# EAGLE board KAI_bit (EAGLE 9.6.2)
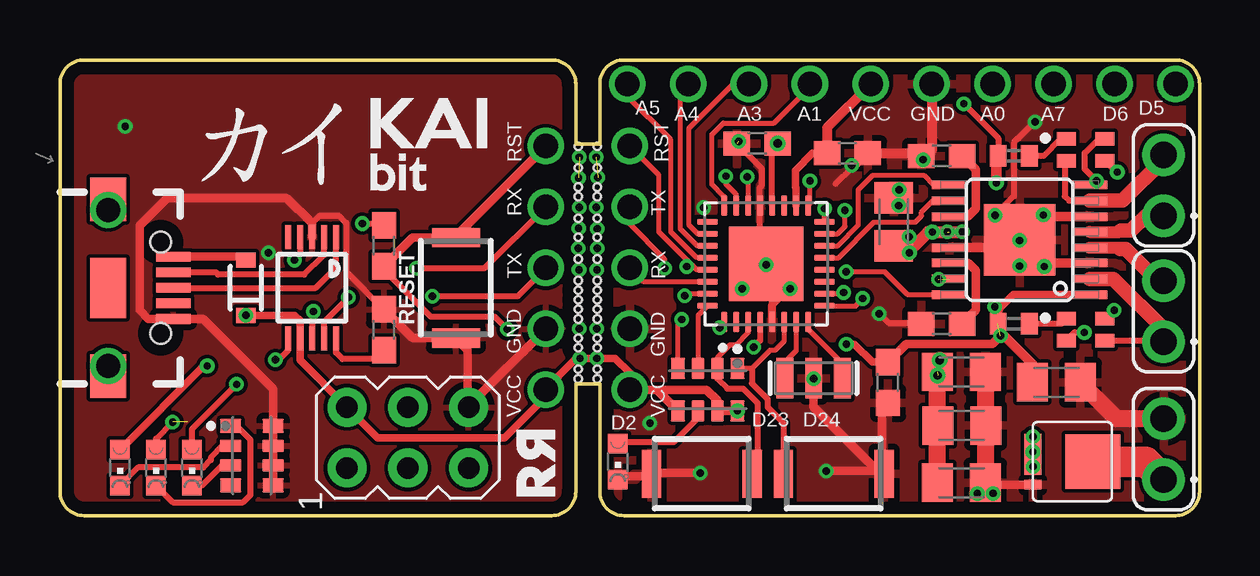
[diagram p0: board, top side]
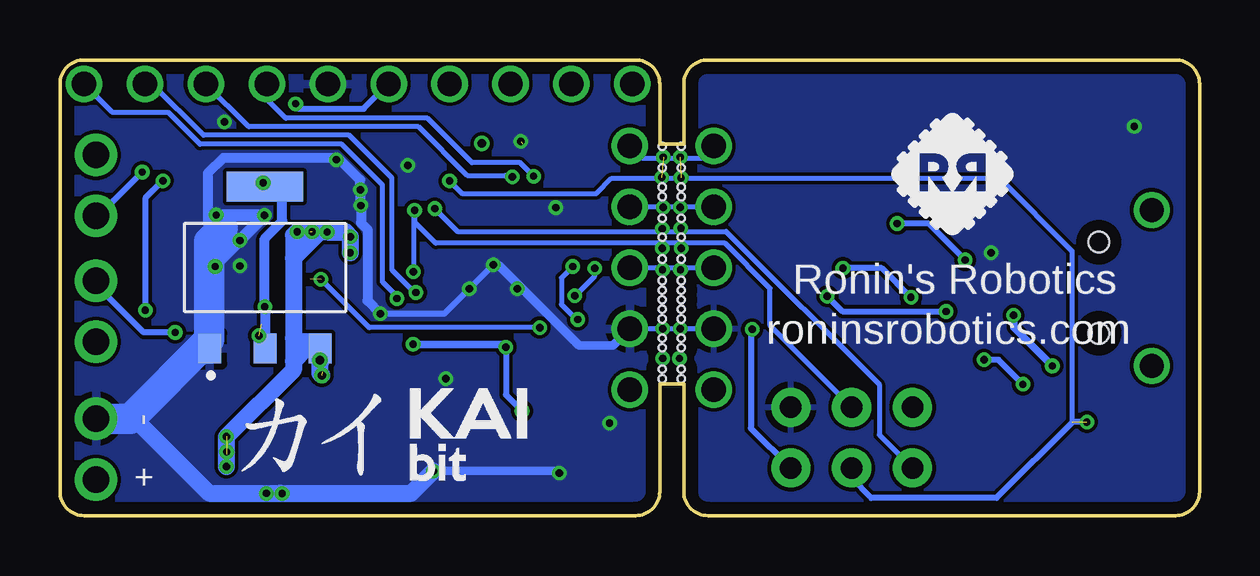
[diagram p1: board, bottom side, seen from below]

Size 47.5 x 19 mm. Coordinates in mm from the lower left corner, seen from the top.
Outline: 23.5,19 46.5,19 arc-90 47.5,18 47.5,1 arc-90 46.5,0 23.5,0 arc-90 22.5,1 22.5,5.5 21.5,5.5 21.5,1 arc-90 20.5,0 1,0 arc-90 0,1 0,18 arc-90 1,19 20.5,19 arc-90 21.5,18 21.5,15.5 22.5,15.5 22.5,18 arc-90 23.5,19
Copper layers (1*16): Top 0.035mm / dielectric 1.6mm / Bottom 0.035mm
Design rules "Elecrow_2-layer_PCB_eagle_rule": minimum track width 6mil, minimum drill 12mil, track to track 6mil, track to pad 6mil, pad to pad 6mil, via to via 8mil, smd to smd 0mil, copper to edge 20mil, drill to drill 10mil, minimum pad ring 6mil, minimum via ring 6mil, stop-mask expansion 0mil, vias tented up to drill 100mil, thermal gap 10mil
Holes 0.3 mm at 22.4,5.7 22.4,6.1 22.4,7 22.4,7.4 22.4,8.2 22.4,8.6 22.4,9 22.4,9.4 22.4,9.8 22.4,10.7 22.4,11.6 22.4,12.4 22.4,13.3 22.4,13.7 22.4,14.5 22.4,15.4 21.6,5.7 21.6,6.1 21.6,7 21.6,7.4 21.6,8.2 21.6,8.6 21.6,9 21.6,9.4 21.6,9.8 21.6,10.7 21.6,11.6 21.6,12.4 21.6,13.3 21.6,13.7 21.6,14.5 21.6,15.4

## Footprints (pad centres in the part's own frame; a part is rotated, then mirrored left to right if it is on the bottom)
C0805K = smd 1.3 x 1.6: 1 -1,0; 2 1,0
SOD-323 = smd 0.63 x 0.83: 1 -1.15,0; 2 1.15,0
AVRISP = drill 0.9 pad 1.626: 1 -1.27,2.54; 2 1.27,2.54; 3 -1.27,0; 4 1.27,0; 5 -1.27,-2.54; 6 1.27,-2.54
USB-B-MICRO-SMD = smd 1.45 x 0.4: D+ 2.725,0; D- 2.725,0.65; GND 2.725,-1.3; ID 2.725,-0.65; VBUS 2.725,1.3 | smd 1.5 x 1.8: SHIELD1 0,3.685; SHIELD2 0,-3.685 | smd 1.5 x 2.5: SHIELD3 0,0 | hole 0.85: 2.2,1.9; 2.2,-1.9
1X10DFR = drill 1.016 pad 1.524: P$1 0,0; P$2 2.54,0; P$3 5.08,0; P$4 7.62,0; P$5 10.16,0; P$6 12.7,0; P$7 15.24,0; P$8 17.78,0; P$9 20.32,0; P$10 22.86,0
0603-RGB = smd 0.8 x 0.55: 1 -0.805,0.455; 2 -0.805,-0.455; 3 0.805,-0.455; 4 0.805,0.455
DFN-8_3X3 = smd 2.29 x 2.29: D 0,0.8 | smd 0.4 x 0.7: G 0.96,-1.7 | smd 1.7 x 0.7: S -0.3,-1.7
R0402 = smd 0.7 x 0.9: 1 -0.65,0; 2 0.65,0
RESCAXS80P320X160X70-8N = smd 0.61 x 0.9: 1 -1.24,-0.885; 4 1.24,-0.885; 5 1.24,0.885; 8 -1.24,0.885 | smd 0.53 x 0.9: 2 -0.4,-0.885; 3 0.4,-0.885; 6 0.4,0.885; 7 -0.4,0.885
SKRK = smd 0.8 x 2: 1 -2.1,0; 2 2.1,0
MSOP10 = smd 1 x 0.25: 1 -2.113,1; 2 -2.113,0.5; 3 -2.113,0; 4 -2.113,-0.5; 5 -2.113,-1; 6 2.113,-1; 7 2.113,-0.5; 8 2.113,0; 9 2.113,0.5; 10 2.113,1
QFN50P500X500X90-33N = smd 0.86 x 0.26: 1 -2.435,1.75; 2 -2.435,1.25; 3 -2.435,0.75; 4 -2.435,0.25; 5 -2.435,-0.25; 6 -2.435,-0.75; 7 -2.435,-1.25; 8 -2.435,-1.75; 17 2.435,-1.75; 18 2.435,-1.25; 19 2.435,-0.75; 20 2.435,-0.25; 21 2.435,0.25; 22 2.435,0.75; 23 2.435,1.25; 24 2.435,1.75 | smd 0.26 x 0.86: 9 -1.75,-2.435; 10 -1.25,-2.435; 11 -0.75,-2.435; 12 -0.25,-2.435; 13 0.25,-2.435; 14 0.75,-2.435; 15 1.25,-2.435; 16 1.75,-2.435; 25 1.75,2.435; 26 1.25,2.435; 27 0.75,2.435; 28 0.25,2.435; 29 -0.25,2.435; 30 -0.75,2.435; 31 -1.25,2.435; 32 -1.75,2.435 | smd 3.1 x 3.1: 33 0,0
SOT-223 = smd 0.96 x 1.26: 1 -2.3,-3.375; 2 0,-3.375; 3 2.3,-3.375 | smd 3.19 x 1.26: 4 0,3.375
SOP65P640X120-17N = smd 1.473 x 0.356: 1 -2.921,2.286; 2 -2.921,1.626; 3 -2.921,0.965; 4 -2.921,0.33; 5 -2.921,-0.33; 6 -2.921,-0.965; 7 -2.921,-1.626; 8 -2.921,-2.286; 9 2.921,-2.286; 10 2.921,-1.626; 11 2.921,-0.965; 12 2.921,-0.33; 13 2.921,0.33; 14 2.921,0.965; 15 2.921,1.626; 16 2.921,2.286 | smd 2.997 x 2.997: 17 0,0
RESONATOR-SMD = smd 0.7 x 1.7: 1 -1.2,0; 2 0,0; 3 1.2,0
1X2 = drill 1.092 pad 1.778: P$1 0,0; P$2 2.54,0
C0603 = smd 1.1 x 1: 1 -0.85,0; 2 0.85,0
0603_LED_GREEN = smd 0.8 x 0.8: A 0,-0.75; C 0,0.75
1X5DFR = drill 1.016 pad 1.524: P$1 0,0; P$2 2.54,0; P$3 5.08,0; P$4 7.62,0; P$5 10.16,0

## Placement (x,y rotation side)
C1  10uf  [C0805K]  34.75,12.25 270 top
C2  CAPACITOR_CER6  [C0805K]  37.57,5.99 0 top
C3  CAPACITOR_CER6  [C0805K]  41.54,5.55 0 top
C4  CAPACITOR_CER6  [C0805K]  37.59,3.75 0 top
C5  CAPACITOR_CER6  [C0805K]  37.58,1.37 0 top
D2  [SOD-323]  7.75,9.5 90 top
ISP1  AVRISP-6  [AVRISP]  14.5,3.25 90 top
J1  [USB-B-MICRO-SMD]  2,9.5 0 top
JP1  [1X10DFR]  46.5,18 180 top
L1  RGB  [0603-RGB]  42.75,15.25 180 top
L2  RGB  [0603-RGB]  42.75,7.75 180 top
Q1  AON7401  [DFN-8_3X3]  42.25,2.25 270 top
R1  RESISTOR1  [R0402]  39.75,8 180 top
R2  YC164-JR-071K5  [RESCAXS80P320X160X70-8N]  27,5.25 180 top
R3  RESISTOR1  [R0402]  39.75,15 180 top
R7  YC164-JR-071K5  [RESCAXS80P320X160X70-8N]  8,2.5 270 top
S1  SKRKAEE010  [SKRK]  16.5,9.5 90 top
S3  SKRKAEE010  [SKRK]  32.25,1.75 180 top
S4  SKRKAEE010  [SKRK]  26.75,1.75 0 top
U1  CH340ESMD  [MSOP10]  10.5,9.5 270 top
U2  ATMEGA328PB-MU  [QFN50P500X500X90-33N]  29.43,10.5 90 top
U4  NCP1117ST33T3G  [SOT-223]  38.95,10.35 0 bottom
U$1  DRV8833  [SOP65P640X120-17N]  40,11.5 180 top
U$2  RESONATORSMD  [RESONATOR-SMD]  31.41,5.73 180 top
U$3  1X2  [1X2]  46,1.5 90 top
U$4  2.2uf  [C0603]  36.75,8 0 top
U$5  CAPACITOR_CER4  [C0603]  34.51,5.55 90 top
U$6  100nf  [C0603]  36.75,15 0 top
U$7  CAPACITOR_CER4  [C0603]  29.06,15.51 0 top
U$8  CAPACITOR_CER4  [C0603]  32.82,15.11 180 top
U$9  CAPACITOR_CER4  [C0603]  13.5,11.25 90 top
U$10  CAPACITOR_CER4  [C0603]  13.5,7.75 90 top
U$11  1X2  [1X2]  46,7.25 90 top
U$12  LED0603_R  [0603_LED_GREEN]  5.5,2 180 top
U$13  1X2  [1X2]  46,12.5 90 top
U$14  LED0603_R  [0603_LED_GREEN]  2.5,2 180 top
U$15  LED0603_R  [0603_LED_GREEN]  23.25,2.25 180 top
U$16  1X5DFR  [1X5DFR]  20.25,5.25 90 top
U$17  1X5DFR  [1X5DFR]  23.75,5.25 90 top
U$21  LED0603_R  [0603_LED_GREEN]  4,2 180 top

## Library data of the parts
C1-C5 L1 L2 R1 R3 U$4-U$10 U$12 U$14 U$15 U$21 = pasif_com1
D2 U$2 = SparkFun
ISP1 = adafruit
J1 = SparkFun-Connectors; PROD_ID: CONN-11752
JP1 U$3 U$11 U$13 U$16 U$17 = header_3d
Q1 = AON7401
R2 R7 = YC164-JR-071K5; AVAILABILITY: Unavailable; DESCRIPTION: Resistor network: Y; 1.5kΩ; SMD; 1206; No.of resistors: 4; 63mW; ±5%; MF: Yageo; MP: YC164-JR-071K5; PACKAGE: 1206 Yageo; PRICE: None
S1 S3 S4 = SKRKAEE010; AVAILABILITY: Unavailable; DESCRIPTION: Switch Tactile N.O. SPST Round Button Gull Wing 0.05A 12VDC 1.57N SMD T/R; MF: ALPS; MP: SKRKAEE010; PACKAGE: None; PRICE: None
U1 = CH340E
U2 = atmega; MANUFACTURER: MICROCHIP; PACKAGE: QFN-32; PARTREV: C; STANDARD: IPC 7351B
U4 = IC; CREATED_BY: PCBLayout.com; DIGIKEY_PART_NUMBER: NCP1117ST33T3GOSTR-ND; MANUFACTURER: ON Semiconductor; MPN: NCP1117ST33T3G; PACKAGE: SOT-223
U$1 = icv1

## Nets
A0: JP1.P$4 U2.23
A1: JP1.P$7 U2.24
A2: U2.25
A3: JP1.P$8 U2.26
A4: JP1.P$9 U2.27
A5: JP1.P$10 U2.28
A6: U2.19
A7: JP1.P$3 U2.22
ARF: U2.20 U$7.2
D2: R2.3 U2.32
D3: U2.1 U$1.15
D4: U2.2
D5: JP1.P$1 U2.9
D6: JP1.P$2 U2.10
D7: U2.11
D8: U2.12
D9: U2.13 U$1.10
D10: U2.14 U$1.9
D11: ISP1.4 U2.15 U$1.16
D12: ISP1.1 U2.16
D13: ISP1.3 U2.17 U$21.A
D23: R2.2 S4.2 U2.3
D24: R2.1 S3.2 U2.6
GND: C1.1 C2.2 C3.2 C4.2 C5.2 ISP1.6 J1.GND JP1.P$5 Q1.G R7.5 R7.6 R7.7 R7.8 S1.1 S3.1 S4.1 U1.3 U2.5 U2.21 U4.1 U$1.3 U$1.6 U$1.13 U$1.17 U$2.2 U$3.P$2 U$4.1 U$5.1 U$6.1 U$7.1 U$8.1 U$10.2 U$15.C U$16.P$2 U$17.P$2
N$1: R7.1 U$21.C
N$2: L1.2 L2.2 U$1.8
N$3: J1.D- U1.2
N$4: R7.3 U$12.C
N$5: U1.10 U$10.1
N$6: J1.D+ U1.1
N$7: D2.2 J1.VBUS
N$8: U1.4 U$9.2
N$9: R7.2 U$14.C
N$10: U1.6 U$12.A
N$11: L1.3 R3.1
N$12: Q1.D U$3.P$1
N$13: L2.1 U$1.2 U$11.P$1
N$14: L2.3 R1.1
N$15: L2.4 U$1.4 U$11.P$2
N$16: L1.1 U$1.5 U$13.P$1
N$18: L1.4 U$1.7 U$13.P$2
N$19: R2.6 U$15.A
N$22: U$1.11 U$6.2
N$25: U$1.14 U$4.2
OC1: U2.7 U$2.3
OC2: U2.8 U$2.1
RST: ISP1.5 R2.4 S1.2 U2.29 U$9.1 U$16.P$5 U$17.P$5
RX: U1.8 U2.30 U$16.P$3 U$17.P$3
TX: U1.9 U2.31 U$16.P$4 U$17.P$4
VCC: C3.1 D2.1 ISP1.2 JP1.P$6 R1.2 R2.5 R2.7 R2.8 R3.2 U1.7 U2.4 U2.18 U4.2 U4.4 U$1.1 U$5.2 U$8.2 U$14.A U$16.P$1 U$17.P$1
VIN: C1.2 C2.1 C4.1 C5.1 Q1.S U4.3 U$1.12

## Tracks (layer width: path | path; a pad name or v marks a point on that pad's centre or on a via)
A0  (via drill 0.3)
  Top 0.2: U2.23 28.18,13.4 27.76,13.83 v27.76,14.15
  Bottom 0.2: v27.76,14.15 28.32,14.71 30.33,14.71 32.19,16.57 38.09,16.57 38.88,17.36 JP1.P$4
A1
  Top 0.2: U2.24 27.68,13.31 27.17,13.82 27.17,15.89 27.65,16.37 29.77,16.37 31.26,17.86 JP1.P$7
A3
  Top 0.2: U2.26 26.59,11.75 26.23,12.11 26.23,16.16 28.08,18.01 28.71,18.01 JP1.P$8
A4
  Top 0.2: U2.27 26.57,11.25 25.86,11.95 25.86,17.68 JP1.P$9
A5
  Top 0.2: U2.28 26.98,10.77 26.53,10.77 25.47,11.82 25.47,15.67 23.64,17.5 JP1.P$10
A7  (via drill 0.3)
  Top 0.2: U2.22 28.69,14.13 v28.65,14.13
  Bottom 0.2: v28.65,14.13 28.89,14.13 28.94,14.18 30.53,14.18 32.56,16.21 39.64,16.21 JP1.P$3
ARF  (via drill 0.35)
  Top 0.2: 29.77,15.37 U$7.2
  Top 0.254: 29.77,15.37 29.68,15.28 U2.20
  other vias: 29.91,15.51
D2
  Top 0.2: U2.32 26.6,8.35 R2.3
D3  (via drill 0.3)  (1 unrouted)
  Top 0.2: U2.1 27.5,7.89 v27.5,7.84
  Bottom 0.2: v27.5,7.84 34.61,7.84 v36.62,9.85
D5  (via drill 0.3)
  Top 0.2: U2.9 31.89,8.73 33.14,8.73 v33.46,9.05
  Bottom 0.2: v33.46,9.05 33.46,9.15 34.06,9.74 34.06,13.79 35.75,15.49 41.66,15.49 42.99,16.82 45.32,16.82 JP1.P$1
D6  (via drill 0.3)
  Top 0.2: v32.67,9.3 32.61,9.25 U2.10
  Bottom 0.2: v32.67,9.3 32.72,9.3 33.66,10.24 33.66,14.08 35.44,15.86 41.52,15.86 43.66,18 JP1.P$2
D9
  Top 0.2: U2.13 32.44,10.75 33.93,12.23 35.65,12.23 35.91,12.49 35.91,12.65 36.38,13.13 U$1.10
D10
  Top 0.2: U2.14 32.42,11.25 33.28,12.11 33.28,13.59 33.88,14.19 36,14.19 36.41,13.79 U$1.9
D11  (via drill 0.3)
  Top 0.2: U2.15 32.41,11.75 32.72,12.06 v32.72,12.73 | v32.77,10.17 34.37,10.17 35.33,9.21 U$1.16
  Bottom 0.2: v32.77,10.17 32.76,10.18 32.76,12.69 v32.72,12.73 32.72,12.24 31.84,11.36 19.79,11.36 17.91,9.47 17.91,7.92 ISP1.4
D12  (via drill 0.3)
  Top 0.2: U2.16 31.87,12.79 v31.88,12.8
  Bottom 0.2: v31.88,12.8 30.93,11.85 19.73,11.85 13.35,5.47 13.35,3.37 ISP1.1
D13  (via drill 0.3)  (1 unrouted)
  Top 0.2: U2.17 31.26,13.02 v31.26,13.95
  Top 0.254: U$21.A 4,3.2 v4.7,3.9
  Bottom 0.2: v31.26,13.95 30.75,13.44 25.14,13.44 24.51,14.06 8.34,14.06 5.31,11.04 5.31,3.9
  Bottom 0.254: v4.7,3.9 5.29,3.9 8.46,0.73 13.69,0.73 14.5,1.54 ISP1.3
D23
  Top 0.2: U2.3 28.68,7.63 28.18,7.12 27.94,7.12 27.4,6.59 R2.2
  Top 0.254: R2.2 27.4,5.71 27.81,5.29 28.47,5.29 29.07,4.69 29.07,1.97 S4.2
D24
  Top 0.2: R2.1 28.84,6.13 29.59,6.89 29.8,6.89 30.17,7.26 U2.6
  Top 0.254: 28.84,6.13 28.84,5.52 29.49,4.86 29.49,4.53 30.15,3.87 S3.2
GND  (via drill 0.3)  (1 unrouted)
  Top 0.2: 24.53,1.63 S4.1
  Top 0.254: U2.5 29.68,10.27 29.18,10.77 U2.21 29.18,13.7 29.25,13.77 29.25,14.48 U$7.1 | 35.83,8.07 U$4.1 35.88,8.02 34.56,8.02 34.24,8.35 34.22,8.35 v34.15,8.42 | S3.1 34.2,1.75 34.1,1.86 v31.93,1.86 | v34.98,13.58 34.98,13.48 C1.1 | 10.51,12.2 10.82,12.51 11.63,12.51 11.93,12.2 11.93,10.17 U$10.2 | v40.64,16.42 39.95,15.73 39.93,15.73 39.77,15.57 39.77,13.31 v38.98,12.53 | v33,14.6 33,14.51 32.32,13.84
  Top 0.305: U2.5 29.68,8.79 30.27,9.37 30.36,9.37 v30.44,9.46 | C2.2 38.58,3.77 C4.2 | U$8.1 33.16,14.6 v33,14.6
  Top 0.35: U$15.C 23.38,1.63 24.53,1.63 | S4.1 24.67,1.77 v26.69,1.77 | v31.93,1.86 34.24,1.86 34.25,1.85 | 34.25,1.85 S3.1 | 34.2,1.75 31.41,4.54 U$2.2 | 35.83,8.04 35.83,8.07 | U$16.P$2 17.04,4.58 | 17.04,4.58 16.99,4.53 16.99,6.91 S1.1 14.7,7.4 U$10.2 | 17.04,4.58 ISP1.6 | R7.5 R7.6 R7.8 8.88,5.28 5.96,8.2 J1.GND 3.68,8.2 3.32,8.56 3.32,12.09 4.48,13.24 9.46,13.24 10.51,12.2 U1.3 | U$5.1 34.25,4.44 34.25,1.85 | 38.69,1.29 Q1.G
  Top 0.4: U$1.6 40.84,12.46 40.66,12.65 40,11.99 U$1.17 | U$1.3 40.31,10.54 39.67,11.17 U$1.13
  Top 0.406: JP1.P$5 36.34,15.2 v35.98,14.84 35.98,14.92 U$6.1 35.79,15.11 U$8.1
  Top 0.508: 39.67,11.17 U$1.17
  Top 0.6: C3.2 42.54,5.85
  Top 0.7: C2.2 C5.2 | U$3.P$2 44.05,4.04 C3.2 | 38.69,1.29 38.61,1.37 C5.2 | C5.2 38.58,1.27 38.24,0.93
  Bottom 0.2: U$16.P$2 U$17.P$2
  Bottom 0.254: v34.15,8.42 31.48,8.42 v29.44,10.46
  Bottom 0.305: 26.67,1.77 v26.69,1.77
  Bottom 0.35: U$17.P$2 24.45,7.09 25.86,7.09 29.23,10.46 v29.44,10.46 | v26.69,1.77 26.77,1.86 v31.93,1.86
  Bottom 0.406: v40.99,12.53 41.34,12.19 41.34,14.27 40.68,14.93 36.06,14.93 v35.98,14.84 35.83,14.84 34.98,13.99 v34.98,13.58 34.98,12.96 v34.95,12.93 34.95,12.2 34.69,11.93 34.69,8.96 v34.15,8.42
  Bottom 0.5: v41.03,10.39 41.03,10.45 v40,11.47 38.98,12.49 v38.98,12.53 38.99,12.53 v40.99,12.53 40.72,12.26 40.72,11.98
  Bottom 0.7: 44.69,4.04 44.58,4.04 44.38,4.04 41.28,0.93 38.31,0.93 | v31.93,1.86 32.86,0.93 38.31,0.93 | v38.9,0.92 38.32,0.92 38.31,0.93
  Bottom 1.27: U$3.P$2 44.69,4.04 | 40.72,11.98 41.27,11.43 41.27,7.34 44.58,4.04
  other vias: 28.44,9.46 8.69,10.96 28.29,15.6 26.83,12.85 31.42,5.7 24.59,3.85 38.24,0.92 39.99,10.41 2.72,16.23
  pour Top: 22.75,0.75 arc90 23.5,0 46.5,0 arc90 47.5,1 47.5,18 arc90 46.5,19 23.5,19 arc90 22.75,18.25
  pour Bottom: 47.5,1 arc-90 46.5,0 23.5,0 arc-90 22.75,0.75 22.75,18.25 arc-90 23.5,19 46.5,19 arc-90 47.5,18
  pour Top: 0,1 0,18 arc-90 1,19 20,19 arc-90 21,18 21,1.25 arc-90 19.75,0 1,0 arc-90
  pour Bottom: 0,18 0,1 arc90 1,0 20,0 arc90 21,1 21,18 arc90 20,19 1,19 arc90
N$1
  Top 0.254: U$21.C 4.69,0.56 7.64,0.56 7.94,0.86 7.94,3.17 7.37,3.74 R7.1
N$2  (via drill 0.3)
  Top 0.254: U$1.8 43.1,13.96 v43.21,13.96 v43.2,13.96 42.71,14.45 42.71,15.12 43.3,15.71 L1.2 | L2.2 43.59,8.21 v43.94,8.56
  Bottom 0.254: v43.94,8.56 43.94,13.23 v43.21,13.96
N$3
  Top 0.254: J1.D- 6.49,10.15 6.59,10.05 10.19,10.05 11,10.86 U1.2
N$4
  Top 0.254: U$12.C 5.91,1.25 6.76,2.1 R7.3
N$5
  Top 0.254: U$10.1 13.12,6.52 11.78,6.52 11.5,6.8 U1.10
N$6
  Top 0.254: J1.D+ 10.66,9.5 11.5,10.34 U1.1
N$7
  Top 0.35: J1.VBUS 7.6,10.8 D2.2
N$8  (via drill 0.3)
  Top 0.254: U1.4 10,10.89 v9.77,10.66 | v12.6,12.18 13.42,12.18 U$9.2
  Bottom 0.254: v9.77,10.66 11.29,12.18 v12.6,12.18
N$9
  Top 0.254: R7.2 6.81,2.9 6.79,2.92 6.29,2.42 6.29,2.31 5.98,2.01 3.26,2.01 U$14.C
N$10  (via drill 0.3)
  Top 0.254: U$12.A 5.5,3.61 v7.36,5.47 | v8.98,6.5 9.11,6.5 9.5,6.88 U1.6
  Bottom 0.254: v7.36,5.47 8.38,6.5 v8.98,6.5
N$11
  Top 0.254: L1.3 41.71,15.71 41,15 R3.1
N$12
  Top 1.27: U$3.P$1 45.25,2.25 Q1.D
N$13
  Top 0.254: L2.1 45.96,7.29 46.03,7.22
  Top 0.6: U$11.P$1 46.03,7.22 46.03,7.75 43.91,9.87 U$1.2
N$14
  Top 0.254: L2.3 41.74,8 R1.1
N$15  (via drill 0.3)
  Top 0.254: L2.4 42.29,7.64 v42.7,7.64
  Top 0.5: U$1.4 44.16,11.17 44.21,11.12
  Top 0.6: 44.21,11.12 44.42,11.12 45.75,9.79 U$11.P$2
  Bottom 0.254: v42.7,7.64 44.02,7.64 46,9.62 U$11.P$2
N$16  (via drill 0.3)
  Top 0.254: L1.1 44.03,14.32 v44.07,14.32
  Top 0.5: 45.8,12.5 U$13.P$1 | U$1.5 44.18,11.83 44.22,11.88
  Top 0.6: 45.62,12.5 45.8,12.5 | 44.22,11.88 44.64,11.88 45.26,12.5 U$13.P$1
  Bottom 0.254: v44.07,14.32 45.9,12.5 U$13.P$1
N$17  (via drill 0.3 pad 0)
  other vias: 21.64,7.79
N$18
  Top 0.254: U$1.7 42.07,13.13 41.88,13.31 41.88,14.79 L1.4
  Top 0.6: U$1.7 44.29,13.13 46,14.84 U$13.P$2
N$19
  Top 0.254: U$15.A 23.32,3.07 25.59,3.07 26.6,4.08 R2.6
N$20  (via drill 0.3 pad 0)
  other vias: 21.64,10.26
N$21  (via drill 0.3 pad 0)
  other vias: 22.38,7.79
N$22
  Top 0.35: U$1.11 37.83,12.46 38.17,12.8 38.17,14.43 U$6.2
N$23  (via drill 0.3 pad 0)
  other vias: 21.61,11.14
N$24  (via drill 0.3 pad 0)
  other vias: 21.62,11.98
N$25
  Top 0.35: U$1.14 37.86,10.54 38.17,10.22 38.17,8.57 U$4.2
N$26  (via drill 0.3 pad 0)
  other vias: 21.65,12.85
N$27  (via drill 0.3 pad 0)  (1 unrouted)
  other vias: 21.61,14.08 21.65,14.95
N$28  (via drill 0.3 pad 0)
  other vias: 22.38,10.26
N$29  (via drill 0.3 pad 0)
  other vias: 22.4,11.14
N$30  (via drill 0.3 pad 0)
  other vias: 22.39,11.96
N$31  (via drill 0.3 pad 0)
  other vias: 22.35,12.85
N$33  (via drill 0.3 pad 0)  (1 unrouted)
  other vias: 22.42,14.1 22.35,14.95
N$34  (via drill 1 pad 0)
  other vias: 2,6.25
N$35  (via drill 1 pad 0)
  other vias: 2,12.75
OC1
  Top 0.2: U2.7 30.68,6.87 30.21,6.4 U$2.3
OC2
  Top 0.2: U2.8 31.18,7.78 32.61,6.35 U$2.1
RST  (via drill 0.3)
  Top 0.2: U2.29 26.54,10.25 26.28,10.52 | U$17.P$5 24.96,14.2 24.96,11.83 26.28,10.52 | R2.4 25.76,8.02 v25.92,8.18 | v26.12,10.38 26.25,10.52 26.28,10.52
  Top 0.254: U$9.1 13.5,10.25 15.46,8.29 18.13,8.29 v18.65,7.77
  Top 0.35: U$16.P$5 16.5,11.66 S1.2 14.7,11.6 U$9.1
  Bottom 0.2: v25.92,8.18 25.96,8.18 26.6,8.81 26.6,9.91 v26.12,10.38 | U$16.P$5 20.75,14.91 23.25,14.91 U$17.P$5
  Bottom 0.254: v18.65,7.77 18.7,7.71 18.7,3.64 ISP1.5
RX  (via drill 0.3)
  Top 0.2: U2.30 24.33,9.75 U$17.P$3
  Top 0.254: U$16.P$3 19.06,9.14 v15.52,9.14 | v10.56,8.51 10.5,8.45 U1.8
  Bottom 0.2: U$16.P$3 U$17.P$3
  Bottom 0.254: v15.52,9.14 14.88,8.51 v10.56,8.51
TX  (via drill 0.3)
  Top 0.2: U2.31 26.13,9.25 v26.04,9.16 | v25.2,10.31 25.2,10.7 23.75,12.15 U$17.P$4
  Top 0.254: U1.9 11,8.07 v12.03,9.1 | U$16.P$4 17.7,10.32 v14.86,10.32
  Bottom 0.2: v26.04,9.16 25.2,10 v25.2,10.31 | U$16.P$4 U$17.P$4
  Bottom 0.254: v12.03,9.1 13.25,10.32 v14.86,10.32
VCC  (via drill 0.3)  (1 unrouted)
  Top 0.254: v37.67,17.17 39.11,15.74 39.11,15.06 | U2.4 29.18,7.3 28.93,7.05 28.93,7.04 v28.92,7.02
  Top 0.305: U$5.2 33.86,6.4 33.11,7.14 v32.78,7.14 | U$1.1 39.74,9.21 39.1,8.58 | U2.18 30.68,13.67 30.65,13.7 30.65,14.39 31.37,15.11 U$8.2 | U$14.A 5.99,6.24 v6.13,6.24 | D2.1 9.78,8.35 10,8.13 U1.7 10,6.48 ISP1.2 13.23,3.25 18.53,3.25 20.25,4.97 U$16.P$1 20.76,5.76 20.76,5.8 21.51,6.55 v22.37,6.55 23.14,6.55 23.75,5.94 U$17.P$1
  Top 0.35: U$5.2 35.28,7.17 38.87,7.17 v39.2,7.5 | U$17.P$1 24.88,5.25 | 24.88,5.25 R2.5 | 24.88,5.25 26.94,5.25 27.4,4.79 R2.7 R2.8
  Top 0.406: v38.97,8.71 39.1,8.58 R1.2 39.1,7.75 40.54,6.32 C3.1 | JP1.P$6 31.97,16.17 U$8.2 | 39.11,15.06 39.03,14.99 v39.03,13.87 39.03,14.93 R3.2
  Bottom 0.254: v37.67,17.17 37.67,17.1 37.53,16.96 34.84,16.96 JP1.P$6 | v28.92,7.02 28.92,5.04 R2.8
  Bottom 0.305: v32.78,7.14 29.03,7.14 v28.92,7.02 | v6.13,6.24 7.75,7.85 D2.1
  Bottom 0.406: U4.2 38.95,8.7 v38.97,8.71 38.97,11.55 38.23,12.28 38.23,13.72 U4.4 38.95,13.79 v39.03,13.87
  other vias: 28.24,4.37 7.75,8.35
VCC1  (via drill 0.3)
  other vias: 21.67,6.55
VIN  (via drill 0.3, 0.35)  (4 unrouted)
  Top 0.254: 35.04,10.96 v35.41,10.96
  Top 0.305: C4.1 36.57,3.77 36.57,6.38
  Top 0.406: Q1.S 40.55,2.06 v40.56,2.04
  Top 0.508: v37.62,11.83 v36.37,11.83 v36.37,11.82 36.19,11.82 35.61,11.25 C1.2
  Top 0.7: C5.1 36.58,5.83 v36.59,5.84 | C1.2 35.04,10.96 | C2.1 36.57,6.38 v36.67,6.48
  Bottom 0.406: U4.3 37.07,7.39 37.77,7.39
  Bottom 0.7: v40.56,2.04 40.56,3.28 37.77,6.08 37.77,6.43 | 37.77,10.73 37.77,7.39 37.77,6.43 | 35.53,11.78 35.58,11.82 v36.37,11.82 36.67,11.82 37.77,10.73 | v36.99,11.83 v37.62,11.83 37.77,11.68 37.77,10.73 | 37.77,6.43 37.23,6.97 U4.3 36.65,6.35 36.67,6.33 36.67,5.93 v36.59,5.84 | v35.41,10.96 35.39,10.97 v35.39,11.62
  other vias: 40.55,2.66 40.56,3.29

## Text on the board
tPlace: A5 | A4 | A3 | A1 | VCC | GND | A0 | A7 | D6 | D5 | RST | RST | RX | TX | RESET | TX | RX | GND | GND | VCC | VCC | D2 | D23 | D24
bPlace: Ronin's Robotics | roninsrobotics.com | - | +